# EAGLE board 4portHub (EAGLE 9.6.2)
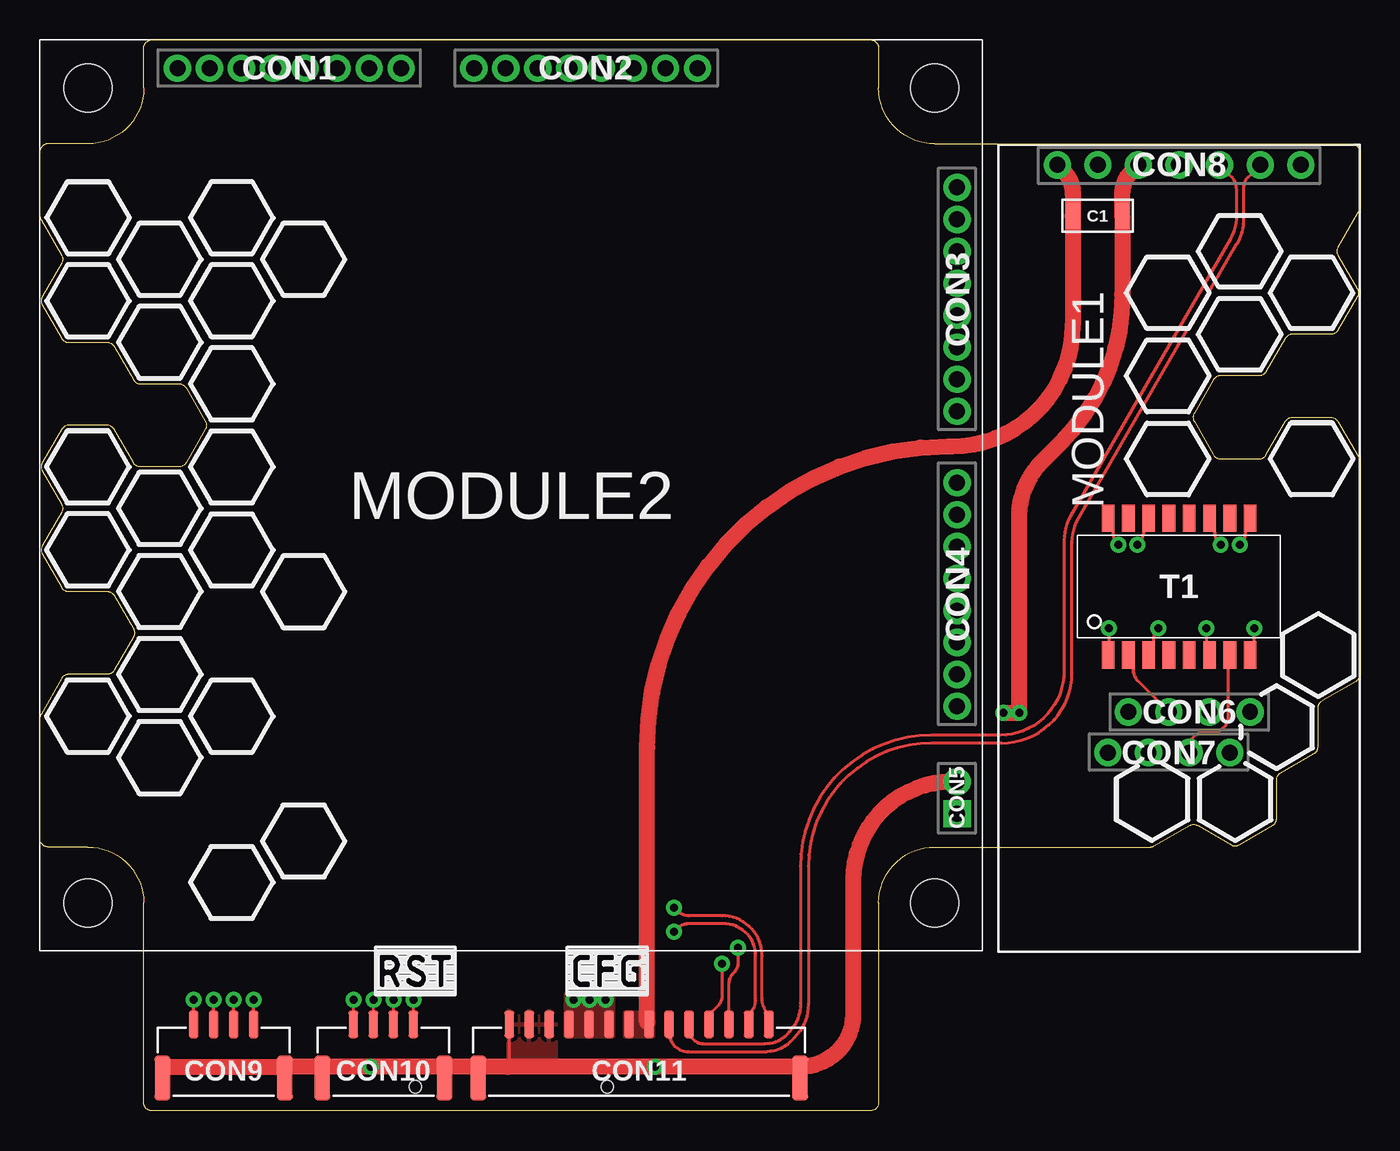
[diagram p0: board, top side]
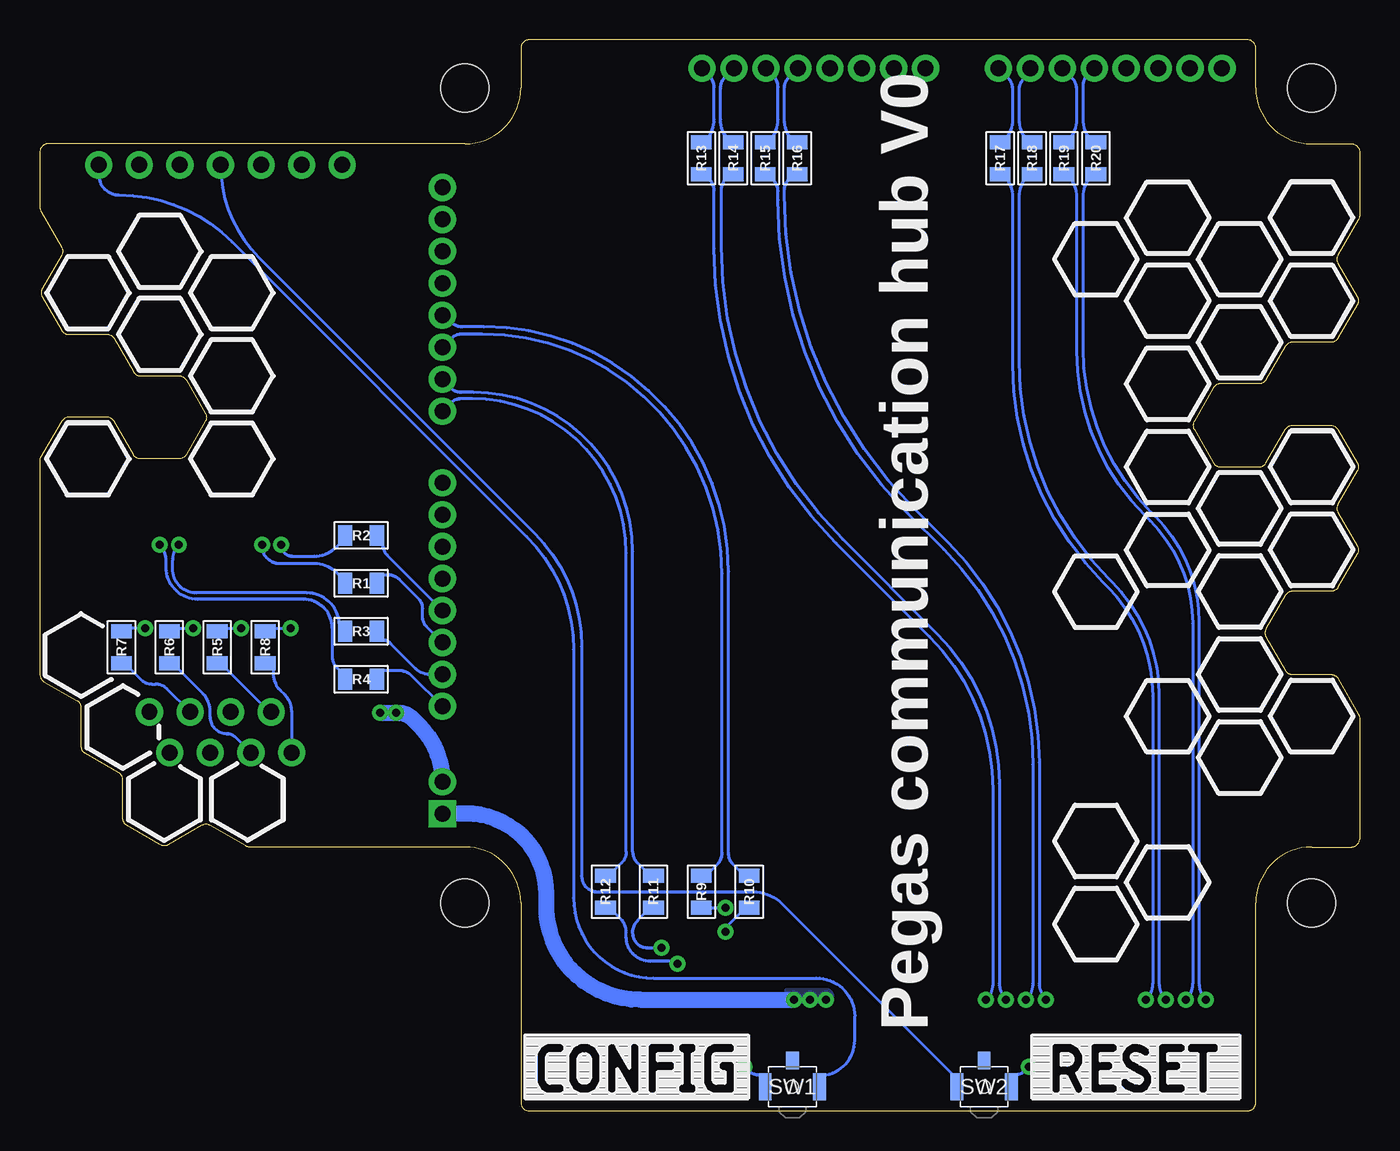
[diagram p1: board, bottom side, seen from below]

Size 82.6 x 67 mm. Coordinates in mm from the lower left corner, seen from the top.
Outline: 56,60.5 82.1,60.5 arc-90 82.6,60 82.6,56.51 arc-30 82.53,56.26 81.24,54.03 arc60 81.24,53.53 82.46,51.43 arc-60 82.46,50.93 81.24,48.83 arc-60 80.81,48.58 78.39,48.58 arc60 77.96,48.33 76.74,46.23 arc-60 76.31,45.98 73.89,45.98 arc60 73.46,45.73 72.24,43.64 arc60 72.24,43.14 73.46,41.04 arc60 73.89,40.79 76.31,40.79 arc60 76.74,41.04 77.96,43.14 arc-60 78.39,43.39 80.81,43.39 arc-60 81.24,43.14 82.6,40.79 82.6,27.29 arc-60 82.35,26.86 80.25,25.64 arc60 80,25.21 80,22.79 arc-60 79.75,22.36 77.66,21.14 arc60 77.41,20.71 77.41,18.29 arc-60 77.16,17.86 75.06,16.64 arc-60 74.56,16.64 72.46,17.86 arc60 71.96,17.86 69.73,16.57 arc-30 69.48,16.5 56,16.5 arc90 52.5,13 52.5,0.5 arc-90 52,0 7,0 arc-90 6.5,0.5 6.5,13 arc90 3,16.5 0.5,16.5 arc-90 0,17 0,24.57 arc-30 0.07,24.82 1.36,27.05 arc-60 1.79,27.3 4.21,27.3 arc60 4.64,27.55 5.86,29.65 arc60 5.86,30.15 4.64,32.24 arc60 4.21,32.49 1.79,32.49 arc-60 1.36,32.74 0.14,34.84 arc-60 0.14,35.34 1.36,37.44 arc60 1.36,37.94 0.14,40.04 arc-60 0.14,40.54 1.36,42.64 arc-60 1.79,42.89 4.21,42.89 arc-60 4.64,42.64 5.86,40.54 arc60 6.29,40.29 8.71,40.29 arc60 9.14,40.54 10.36,42.64 arc60 10.36,43.14 9.14,45.23 arc60 8.71,45.48 6.29,45.48 arc-60 5.86,45.73 4.64,47.83 arc60 4.21,48.08 1.79,48.08 arc-60 1.36,48.33 0.14,50.43 arc-60 0.14,50.93 1.36,53.03 arc60 1.36,53.53 0.07,55.76 arc-30 0,56.01 0,60 arc-90 0.5,60.5 3,60.5 arc90 6.5,64 6.5,66.5 arc-90 7,67 52,67 arc-90 52.5,66.5 52.5,64 arc90 56,60.5
Copper layers (1*16): Top 0.035mm / dielectric 1.5mm / Bottom 0.035mm
Design rules "JLCPCB 2 layer *": minimum track width 6mil, minimum drill 0.3mm, track to track 0.15mm, track to pad 0.15mm, pad to pad 0.15mm, via to via 0.15mm, smd to smd 0.1mm, copper to edge 0.2mm, drill to drill 6mil, minimum pad ring 0.15mm, minimum via ring 0.15mm, stop-mask expansion 0.05mm, vias tented up to drill 0.5mm, thermal gap 10mil

## Footprints (pad centres in the part's own frame; a part is rotated, then mirrored left to right if it is on the bottom)
C1206 = smd 0.9 x 1.6: P$1 -1.55,0; P$2 1.55,0
BM04B-GHS-TB = smd 0.6 x 1.7: 1 -1.875,-2.9; 2 -0.625,-2.9; 3 0.625,-2.9; 4 1.875,-2.9 | smd 1 x 2.8: M$0 -3.825,0.45; M$1 3.825,0.45
BM14B-GHS-TBT = smd 0.6 x 1.7: 1 -8.125,-2.9; 2 -6.875,-2.9; 3 -5.625,-2.9; 4 -4.375,-2.9; 5 -3.125,-2.9; 6 -1.875,-2.9; 7 -0.625,-2.9; 8 0.625,-2.9; 9 1.875,-2.9; 10 3.125,-2.9; 11 4.375,-2.9; 12 5.625,-2.9; 13 6.875,-2.9; 14 8.125,-2.9 | smd 1 x 2.8: M$0 -10.075,0.45; M$1 10.075,0.45
USR-TCP232-T2 = drill 1 pad 1.7: 3.3V -23.98,-5.08; 5V -23.98,-7.62; CFG -23.98,7.62; GND -23.98,-2.54; J1 12.79,-4.445; J2 10.25,-3.175; J3 12.79,-1.905; J4 10.25,-0.635; J5 12.79,0.635; J6 10.25,1.905; J7 12.79,3.175; J8 10.25,4.445; RST -23.98,0; RXD -23.98,5.08; TXD -23.98,2.54
ANDDEAR_4PORT2 = drill 1 pad 1.7: GND -17.91,-27.91; J2.1 -13.2,-27.91; J2.2 -11.2,-27.91; J2.3 -9.2,-27.91; J2.4 -7.2,-27.91; J2.5 -5.2,-27.91; J2.6 -3.2,-27.91; J2.7 -1.2,-27.91; J2.8 0.8,-27.91; J3.1 5.27,-27.91; J3.2 7.27,-27.91; J3.3 9.27,-27.91; J3.4 11.27,-27.91; J3.5 13.27,-27.91; J3.6 15.27,-27.91; J3.7 17.27,-27.91; J3.8 19.27,-27.91; J4.1 26.73,-11.66; J4.2 26.73,-9.66; J4.3 26.73,-7.66; J4.4 26.73,-5.66; J4.5 26.73,-3.66; J4.6 26.73,-1.66; J4.7 26.73,0.34; J4.8 26.73,2.34; J5.1 26.73,6.89; J5.2 26.73,8.89; J5.3 26.73,10.89; J5.4 26.73,12.89; J5.5 26.73,14.89; J5.6 26.73,16.89; J5.7 26.73,18.89; J5.8 26.73,20.89 | drill 1 pad 1.7 square: SUP -19.91,-27.91 | hole 3: 25.5,-26.5; -25.5,-26.5; 25.5,26.5; -25.5,26.5
R0805 = smd 0.9 x 1.3: 1 -1,0; 2 1,0
B3U-3100P(M)-B = smd 0.8 x 1.7: P$1 -1.7,0; P$2 1.7,0 | smd 0.8 x 1.1: P$3 0,-1.65 | hole 0.75: 0,0
H1102 = smd 0.8 x 1.7: 1 -4.445,-4.28; 2 -3.175,-4.28; 3 -1.905,-4.28; 4 -0.635,-4.28; 5 0.635,-4.28; 6 1.905,-4.28; 7 3.175,-4.28; 8 4.445,-4.28; 9 4.445,4.28; 10 3.175,4.28; 11 1.905,4.28; 12 0.635,4.28; 13 -0.635,4.28; 14 -1.905,4.28; 15 -3.175,4.28; 16 -4.445,4.28

## Placement (x,y rotation side)
C1  10uF  [C1206]  66.2,56 180 top
CON9  CON-4P-TABS-JST-GH-TOP  [BM04B-GHS-TB]  11.5,2.5 180 top
CON10  CON-4P-TABS-JST-GH-TOP  [BM04B-GHS-TB]  21.5,2.5 180 top
CON11  CON-14P-TABS-JST-GH-TOP  [BM14B-GHS-TBT]  37.5,2.5 180 top
MODULE1  USR-TCP232-T2  [USR-TCP232-T2]  71.3,35.2 270 top
MODULE2  ANDDEAR_4PORT2  [ANDDEAR_4PORT2]  29.5,38.5 90 top
R1  000  [R0805]  62.5,33 0 bottom
R2  000  [R0805]  62.5,36 0 bottom
R3  000  [R0805]  62.5,30 0 bottom
R4  000  [R0805]  62.5,27 0 bottom
R5  000  [R0805]  71.5,29 90 bottom
R6  000  [R0805]  74.5,29 90 bottom
R7  000  [R0805]  77.5,29 90 bottom
R8  000  [R0805]  68.5,29 90 bottom
R9  000  [R0805]  41.2,13.7 90 bottom
R10  000  [R0805]  38.2,13.7 90 bottom
R11  000  [R0805]  44.2,13.7 90 bottom
R12  000  [R0805]  47.2,13.7 90 bottom
R13  000  [R0805]  41.2,59.6 270 bottom
R14  000  [R0805]  39.2,59.6 270 bottom
R15  000  [R0805]  37.2,59.6 270 bottom
R16  000  [R0805]  35.2,59.6 270 bottom
R17  000  [R0805]  22.5,59.6 270 bottom
R18  000  [R0805]  20.5,59.6 270 bottom
R19  000  [R0805]  18.5,59.6 270 bottom
R20  000  [R0805]  16.5,59.6 270 bottom
SW1  TACT_SWITCH-B3U-3100P(M)-B  [B3U-3100P(M)-B]  35.5,1.5 180 bottom
SW2  TACT_SWITCH-B3U-3100P(M)-B  [B3U-3100P(M)-B]  23.5,1.5 180 bottom
T1  H1102NL  [H1102]  71.3,32.8 0 top

## Library data of the parts
C1 = rc; PACKAGE: 1206; VOLTAGE: 10V
CON9 CON10 = Connectors; DIGIKEY#: 455-1580-2-ND; ENTRY: TOP; LCSC#: C161692; MANF: JST Sales America Inc; MANF#: BM04B-GHS-TBT(LF)(SN)(N); OPERATING_TEMP: -25°C ~ 85°C
CON11 = Connectors; ENTRY: TOP; LCSC#: C265384; MANF: JST Sales America; MANF#: BM14B-GHS-TBT(LF)(SN)
MODULE1 = ali_modules; MANF: Waveshare; MANF#: USR-TCP232-T2
MODULE2 = ali_modules; MANF: ANDDEAR; MANF#: 4 port 2
R1-R20 = rc; PACKAGE: 0805; TOLERANCE: 1%
SW1 SW2 = mechanical; MANF: OMRON; MANF#: B3U-3100P(M)-B
T1 = misc; DIGIKEY#: 553-1203-ND; MANF: Pulse Electronics Corporation; MANF#: H1102

## Nets
CFG: MODULE1.CFG SW1.P$1
ETH_RX+: CON11.2 R10.1
ETH_RX-: CON11.1 R9.1
ETH_TX+: CON11.4 R12.1
ETH_TX-: CON11.3 R11.1
ETH_UART_RX: CON11.6 MODULE1.RXD
ETH_UART_TX: CON11.5 MODULE1.TXD
GND: C1.P$1 CON9.M$0 CON9.M$1 CON10.M$0 CON10.M$1 CON11.12 CON11.13 CON11.14 CON11.M$0 CON11.M$1 MODULE1.GND MODULE2.GND SW1.P$2 SW2.P$1
N$1: R7.2 T1.8
N$2: R6.2 T1.6
N$3: R5.2 T1.3
N$4: R8.2 T1.1
N$5: R4.1 T1.9
N$6: R3.1 T1.11
N$7: R1.1 T1.14
N$8: R2.1 T1.16
N$9: MODULE2.J2.1 R4.2
N$10: MODULE2.J2.2 R3.2
N$11: MODULE2.J2.3 R1.2
N$12: MODULE2.J2.4 R2.2
N$13: MODULE1.J6 R7.1
N$14: MODULE1.J1 R8.1
N$15: MODULE1.J2 R5.1
N$16: MODULE1.J3 R6.1
N$17: MODULE2.J3.3 R9.2
N$18: MODULE2.J3.4 R10.2
N$19: MODULE2.J3.2 R11.2
N$20: MODULE2.J3.1 R12.2
N$21: CON9.1 R17.2
N$22: CON9.2 R18.2
N$23: CON9.3 R19.2
N$24: CON9.4 R20.2
N$25: CON10.1 R13.2
N$26: CON10.2 R14.2
N$27: CON10.3 R15.2
N$28: CON10.4 R16.2
N$29: MODULE2.J4.1 R13.1
N$30: MODULE2.J4.2 R14.1
N$31: MODULE2.J4.3 R15.1
N$32: MODULE2.J4.4 R16.1
N$33: MODULE2.J5.1 R17.1
N$34: MODULE2.J5.2 R18.1
N$35: MODULE2.J5.3 R19.1
N$36: MODULE2.J5.4 R20.1
N$37: MODULE1.J5 T1.7
N$38: MODULE1.J4 T1.2
RST: MODULE1.RST SW2.P$2
VDD_5V: C1.P$2 CON11.7 CON11.8 MODULE1.5V
VDD_12V: CON11.9 CON11.10 CON11.11 MODULE2.SUP

## Tracks (layer width: path | path; a pad name or v marks a point on that pad's centre or on a via)
CFG
  Bottom 0.2: MODULE1.CFG 78.92,58.58 arc-90 77.64,57.3 arc45 70.57,54.37 52.13,35.93 arc45 49.2,28.86 49.2,13.3 arc-90 44.2,8.3 34,8.3 arc90 31.6,5.9 31.6,4.4 arc90 33.8,2.2 SW1.P$1
ETH_RX+  (via drill 0.5 pad 1)
  Top 0.2: v39.7,11.2 39.91,11.41 arc-45 40.61,11.7 42.8,11.7 arc-90 44.8,9.7 44.8,7.02 arc-45 44.38,5.99 CON11.2
  Bottom 0.2: R10.1 38.45,12.7 39.7,11.45 v39.7,11.2
ETH_RX-  (via drill 0.5 pad 1)
  Top 0.2: v39.7,12.7 39.91,12.49 arc45 40.61,12.2 42.7,12.2 arc-90 45.2,9.7 45.2,7.02 arc45 45.62,5.99 CON11.1
  Bottom 0.2: R9.1 v39.7,12.7
ETH_TX+  (via drill 0.5 pad 1)
  Top 0.2: v42.7,9.2 42.7,7.24 arc-45 42.41,6.53 41.88,6 CON11.4
  Bottom 0.2: R12.1 46.95,12.7 46.24,11.99 arc45 45.9,11.16 45.9,10.85 arc-90 44.4,9.35 42.85,9.35 v42.7,9.2
ETH_TX-  (via drill 0.5 pad 1)
  Top 0.2: v43.7,10.2 43.7,9.31 arc-45 43.41,8.61 43.39,8.59 arc45 43.1,7.89 43.1,5.42 CON11.3
  Bottom 0.2: R11.1 44.4,12.7 45.16,11.94 arc-45 45.5,11.12 arc-90 44.59,10.2 v43.7,10.2
ETH_UART_RX
  Top 0.2: CON11.6 39.38,4.9 arc90 40.58,3.7 45.52,3.7 arc45 46.94,4.29 47.22,4.57 arc45 48.1,6.69 48.1,15.3 arc-90 55.8,23 60.2,23 arc90 64.6,27.4 64.6,35.55 arc-30 65,37.05 74.93,54.25 arc30 75.33,55.75 75.33,57.72 arc-45 75.62,58.42 MODULE1.RXD
ETH_UART_TX
  Top 0.2: CON11.5 40.62,5.1 arc90 41.52,4.2 45.37,4.2 arc45 46.79,4.79 arc45 47.6,6.75 47.6,15.3 arc-90 55.8,23.5 60.1,23.5 arc90 64.1,27.5 64.1,35.7 arc-30 64.5,37.2 74.5,54.53 arc30 74.9,56.03 74.9,57.71 arc45 74.61,58.41 MODULE1.TXD
GND  (via drill 0.5 pad 1)
  Top 0.2: CON11.14 29.38,2.83 29.3,2.75 | CON10.M$1 17.68,2.62 17.8,2.75 | CON9.M$0 15.32,2.67 15.4,2.75 | CON11.M$0 47.58,2.73 47.6,2.75 | CON11.M$1 27.4,2.08 27.4,2.75 | CON9.M$1 7.67,2.73 7.7,2.75 | CON10.M$0 25.3,2.08 25.3,2.75
  Top 1: MODULE1.GND 68.34,58.76 arc45 67.75,57.34 C1.P$1 67.75,51.06 arc-45 63.92,41.82 62.76,40.66 arc45 61.3,37.13 v61.3,24.9 v60.3,24.9 | MODULE2.GND 57.09,20.59 arc90 50.9,14.4 50.9,6.05 arc-90 47.6,2.75 v38.5,2.75 29.3,2.75 27.4,2.75 25.3,2.75 v20.7,2.75 17.8,2.75 15.4,2.75 7.7,2.75
  Bottom 0.2: SW1.P$2 37.2,2.2 37.25,2.25 37.59,2.25 arc45 38.29,2.54 v38.5,2.75 | v20.7,2.75 20.91,2.54 arc45 21.61,2.25 21.8,2.25 SW2.P$1
  Bottom 1: v61.3,24.9 v60.3,24.9 60.19,24.9 arc45 59.27,24.52 58.87,24.12 arc45 MODULE2.GND
  pour Top: 29.3,6.3 32.3,6.3 32.3,2.35 29.3,2.35
N$1  (via drill 0.5 pad 1)
  Top 0.2: v76,30.2 76,28.77 T1.8
  Bottom 0.2: v76,30.2 77.3,30.2 R7.2
N$2  (via drill 0.5 pad 1)
  Top 0.2: v73,30.2 73,28.72 T1.6
  Bottom 0.2: R6.2 74.3,30.2 v73,30.2
N$3  (via drill 0.5 pad 1)
  Top 0.2: v70,30.2 69.99,30.19 arc45 69.69,29.48 69.69,28.82 T1.3
  Bottom 0.2: R5.2 71.3,30.2 v70,30.2
N$4  (via drill 0.5 pad 1)
  Top 0.2: v66.9,30.2 66.9,28.57 T1.1
  Bottom 0.2: R8.2 68.3,30.2 v66.9,30.2
N$5  (via drill 0.5 pad 1)
  Top 0.2: T1.9 75.44,36.78 75.44,36.23 arc-45 v75.1,35.4
  Bottom 0.2: v75.1,35.4 arc45 74.7,34.43 74.7,34 arc-90 72.7,32 66.1,32 arc90 64.3,30.2 64.3,28.41 arc-45 64.01,27.71 63.5,27.2 R4.1
N$6  (via drill 0.5 pad 1)
  Top 0.2: T1.11 73.5,36.78 73.5,36.35 arc45 v73.9,35.4
  Bottom 0.2: v73.9,35.4 arc-45 74.3,34.43 74.3,33.9 arc-90 72.8,32.4 65.9,32.4 arc90 63.85,30.35 R3.1
N$7  (via drill 0.5 pad 1)
  Top 0.2: T1.14 69.09,36.78 69.09,36.35 arc-45 v68.7,35.4
  Bottom 0.2: v68.7,35.4 68.7,35.35 arc-90 67.6,34.25 65.43,34.25 arc45 64.01,33.66 63.5,33.15 R1.1
N$8  (via drill 0.5 pad 1)
  Top 0.2: T1.16 67.16,36.78 67.16,36.23 arc45 v67.5,35.4
  Bottom 0.2: v67.5,35.4 arc-90 66.8,34.7 65.43,34.7 arc-45 64.01,35.29 63.5,35.8 R2.1
N$9
  Bottom 0.2: MODULE2.J2.1 59.35,27.24 arc-45 60.09,27.55 61.5,27.55 R4.2
N$10
  Bottom 0.2: R3.2 61.5,29.45 61.17,29.45 arc45 60.64,29.23 59.07,27.66 arc-45 58.2,27.3 MODULE2.J2.2
N$11
  Bottom 0.2: MODULE2.J2.3 58.37,30.26 arc45 58.66,30.96 58.66,31.39 arc-45 58.95,32.09 60.12,33.26 arc-45 60.82,33.55 61.45,33.55 61.5,33.5 R1.2
N$12
  Bottom 0.2: R2.2 61.15,35.65 61.15,35.45 arc-45 60.86,34.75 MODULE2.J2.4
N$13
  Bottom 0.2: MODULE1.J6 74.66,26.41 arc-45 75.37,26.7 75.59,26.7 arc45 76.29,26.99 77.3,28 R7.1
N$14
  Bottom 0.2: R8.1 68.05,28 68,27.95 68,27.37 arc-45 67.56,26.31 67.29,26.04 arc45 66.85,24.98 MODULE1.J1
N$15
  Bottom 0.2: R5.1 71.3,28 68.25,24.95 MODULE1.J2
N$16
  Bottom 0.2: R6.1 74.3,28 72.39,26.09 arc45 71.95,25.03 71.95,24.64 arc-90 70.91,23.6 arc45 70.36,23.37 MODULE1.J3
N$17
  Bottom 0.2: R9.2 40.9,14.7 40.19,15.41 arc-45 39.9,16.11 39.9,33.6 arc-90 54.9,48.6 56.17,48.6 arc-45 56.87,48.31 MODULE2.J3.3
N$18
  Bottom 0.2: R10.2 38.5,14.7 39.21,15.41 arc45 39.5,16.11 39.5,33.75 arc-90 54.8,49.05 56.18,49.05 arc45 56.88,49.34 57.31,49.77 MODULE2.J3.4
N$19
  Bottom 0.2: R11.2 44.4,14.7 45.21,15.51 arc45 45.5,16.21 45.5,35 arc-90 55.45,44.95 56.23,44.95 arc45 56.93,45.24 57.41,45.72 MODULE2.J3.2
N$20
  Bottom 0.2: R12.2 47,14.7 46.19,15.51 arc-45 45.9,16.21 45.9,34.9 arc-90 55.55,44.55 56.22,44.55 arc-45 56.92,44.26 MODULE2.J3.1
N$21  (via drill 0.5 pad 1)
  Top 0.2: CON9.1 v13.38,6.95
  Bottom 0.2: R17.2 22.3,58.6 22.29,58.59 arc45 21.7,57.17 21.7,46.71 arc-45 16.04,33.04 15.77,32.77 arc45 12.95,25.96 12.95,7.98 arc45 v13.38,6.95
N$22  (via drill 0.5 pad 1)
  Top 0.2: CON9.2 v12.12,6.95
  Bottom 0.2: R18.2 20.7,58.6 20.71,58.59 arc-45 21.3,57.17 21.3,46.85 arc-45 15.68,33.28 15.5,33.1 arc45 12.55,25.98 12.55,7.98 arc-45 v12.12,6.95
N$23  (via drill 0.5 pad 1)
  Top 0.2: CON9.3 v10.88,6.95
  Bottom 0.2: R19.2 18.3,58.6 18.29,58.59 arc45 17.7,57.17 17.7,47.56 arc-45 13.41,37.22 13.1,36.9 arc45 10.45,30.5 10.45,7.98 arc45 v10.88,6.95
N$24  (via drill 0.5 pad 1)
  Top 0.2: CON9.4 v9.62,6.95
  Bottom 0.2: R20.2 16.7,58.6 16.71,58.59 arc-45 17.3,57.17 17.3,47.75 arc-45 13.02,37.42 12.79,37.19 arc45 10.05,30.57 10.05,7.98 arc-45 v9.62,6.95
N$25  (via drill 0.5 pad 1)
  Top 0.2: CON10.1 v23.38,6.95
  Bottom 0.2: R13.2 41,58.6 40.69,58.29 arc45 40.4,57.59 40.4,53.95 arc-45 32.76,35.51 26.91,29.66 arc45 22.95,20.09 22.95,7.98 arc45 v23.38,6.95
N$26  (via drill 0.5 pad 1)
  Top 0.2: CON10.2 v22.12,6.95
  Bottom 0.2: R14.2 39.35,58.6 39.66,58.29 arc-45 39.95,57.59 39.95,54.1 arc-45 32.34,35.74 26.43,29.83 arc45 22.55,20.46 22.55,7.98 arc-45 v22.12,6.95
N$27  (via drill 0.5 pad 1)
  Top 0.2: CON10.3 v20.88,6.95
  Bottom 0.2: R15.2 37.05,58.6 36.69,58.24 arc45 36.4,57.54 36.4,56.97 arc-45 28.29,37.39 26.03,35.13 arc45 20.45,21.66 20.45,7.98 arc45 v20.88,6.95
N$28  (via drill 0.5 pad 1)
  Top 0.2: CON10.4 v19.62,6.95
  Bottom 0.2: R16.2 35.4,58.6 35.71,58.29 arc-45 36,57.59 36,57.29 arc-45 27.87,37.67 25.76,35.56 arc45 20.05,21.77 20.05,7.98 arc-45 v19.62,6.95
N$29
  Bottom 0.2: R13.1 41,60.6 40.99,60.61 arc-45 40.4,62.03 40.4,64.06 arc-45 40.69,64.76 MODULE2.J4.1
N$30
  Bottom 0.2: R14.1 39.4,60.6 39.41,60.61 arc45 40,62.03 40,63.98 arc45 39.71,64.68 MODULE2.J4.2
N$31
  Bottom 0.2: R15.1 37,60.6 36.99,60.61 arc-45 36.4,62.03 36.4,64.06 arc-45 36.69,64.76 MODULE2.J4.3
N$32
  Bottom 0.2: R16.1 35.4,60.6 35.41,60.61 arc45 36,62.03 36,63.98 arc45 35.71,64.68 MODULE2.J4.4
N$33
  Bottom 0.2: R17.1 22.3,60.6 22.29,60.61 arc-45 21.7,62.03 21.7,63.91 arc-45 21.99,64.61 MODULE2.J5.1
N$34
  Bottom 0.2: R18.1 20.7,60.6 20.71,60.61 arc45 21.3,62.03 21.3,63.88 arc45 21.01,64.58 20.61,64.98 MODULE2.J5.2
N$35
  Bottom 0.2: R19.1 18.3,60.6 18.29,60.61 arc-45 17.7,62.03 17.7,63.91 arc-45 17.99,64.61 MODULE2.J5.3
N$36
  Bottom 0.2: R20.1 16.7,60.6 16.71,60.61 arc45 17.3,62.03 17.3,64.13 arc45 17.01,64.83 MODULE2.J5.4
N$37
  Top 0.2: MODULE1.J5 71.94,22.7 arc-90 72.94,23.7 73.4,23.7 arc90 74.4,24.7 74.4,28.45 T1.7
N$38
  Top 0.2: MODULE1.J4 68.72,26.9 arc-45 68.42,27.6 68.42,28.22 T1.2
RST
  Bottom 0.2: MODULE1.RST arc-45 68.91,53.41 51.63,36.13 arc45 48.7,29.06 48.7,14.7 arc-90 47.7,13.7 37.97,13.7 arc45 36.14,12.94 25.2,2 SW2.P$2
VDD_5V
  Top 1: MODULE1.5V 64.06,58.8 arc-45 64.65,57.38 C1.P$2 64.65,49.15 arc-90 57.07,41.57 56.85,41.57 arc90 38,22.72 38,5.55
  pour Top (no thermals): 36.6,4.6 36.6,6.2 38.4,6.2 38.4,4.6
VDD_12V  (via drill 0.5 pad 1)
  Bottom 1: v35.4,6.95 45.05,6.95 arc90 50.9,12.8 50.9,13.59 arc-90 55.9,18.59 MODULE2.SUP
  other vias: 34.4,6.95 33.4,6.95
  pour Top (no thermals): 32.9,4.6 32.9,7.35 35.9,7.35 35.9,4.6
  pour Bottom (no thermals): 35.9,6.8 35.9,7.6 33.4,7.6 arc90 33,7.2 arc90 33.4,6.8

## Text on the board
bPlace: Pegas communication hub V0
tNames: CON1 | CON2 | CON8 | CON3 | CON4 | CON6 | CON7 | CON5